# Altium PCB PLL_PCB.PcbDoc (part 3 of 3)
Units mil, origin at the board's own origin, x right, y up, seen from the top; angles counter-clockwise.
Board outline 8251 x 7030 mil, 4 copper layers (Top Layer, Mid-Layer 1, Mid-Layer 2, Bottom Layer); 235 components, 120 nets, 656 pads, 49 vias.
Unrouted connection lines stored in the file: 215.
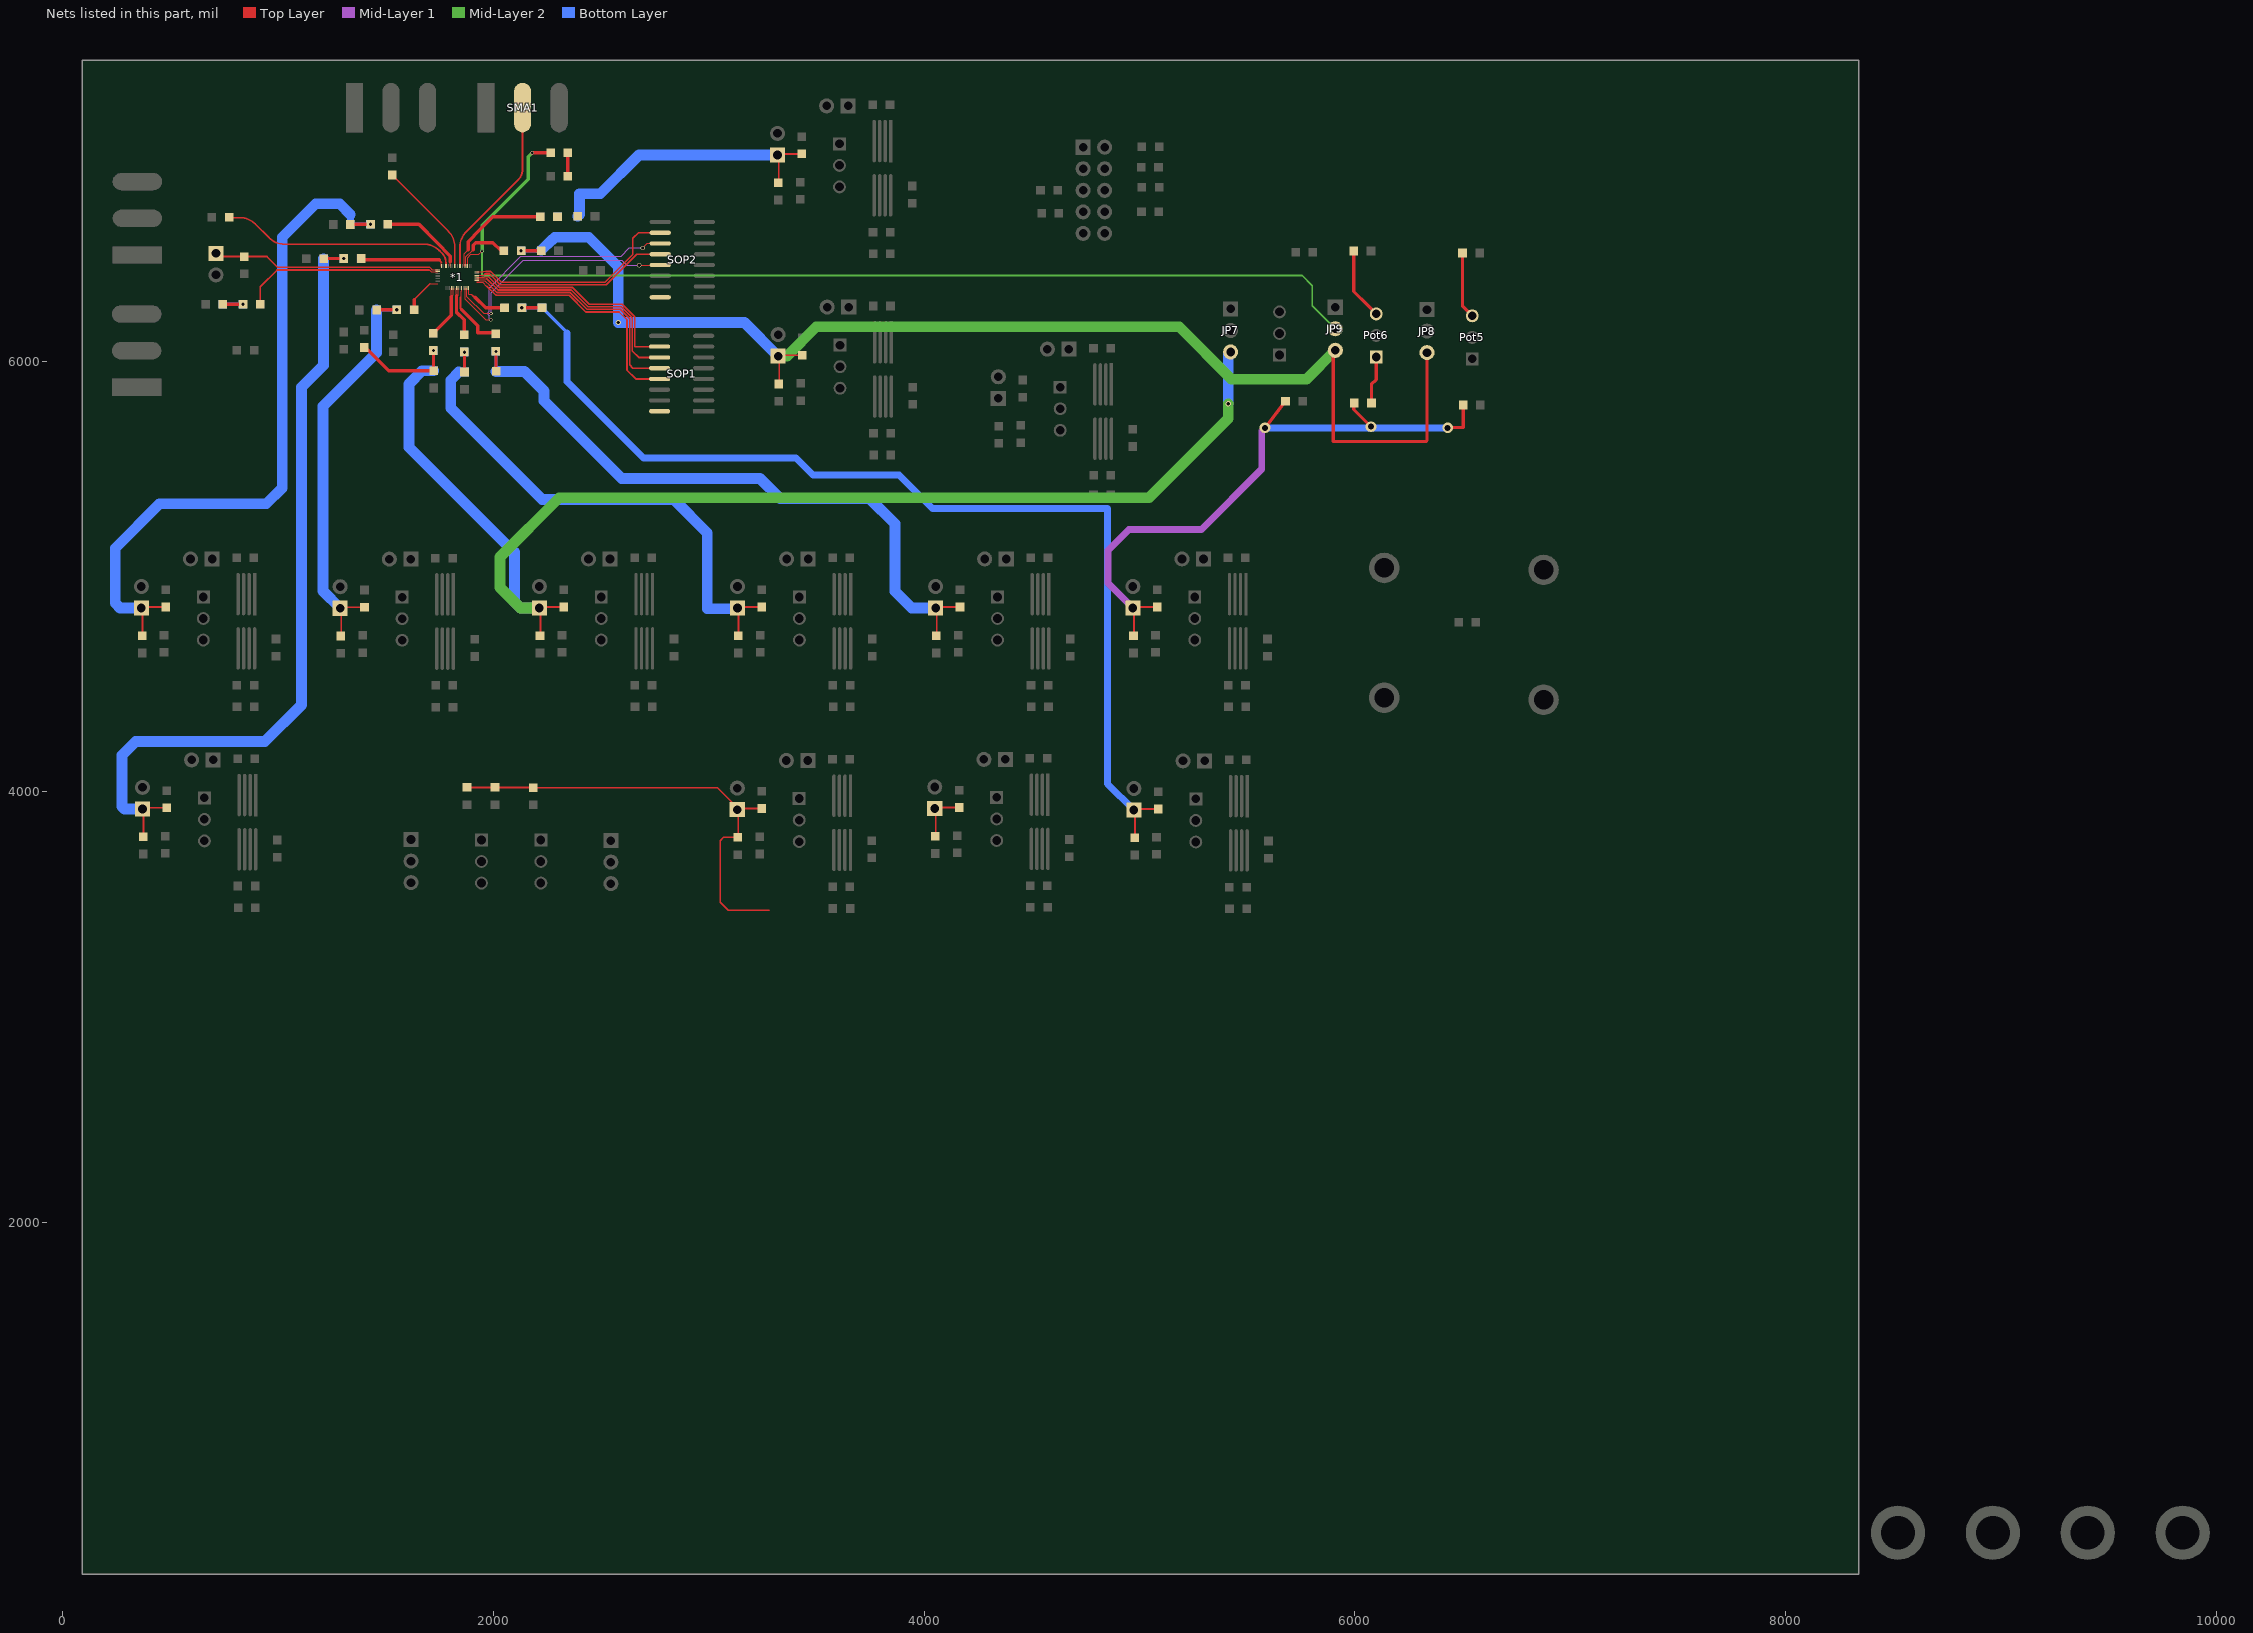
[diagram p5: the nets of this part, all layers, seen from the top]

## Via types
v1: diameter 15, hole 10, Top Layer to Bottom Layer, 17 vias
v2: diameter 50, hole 28, Top Layer to Bottom Layer, 16 vias
v3: diameter 20, hole 15, Top Layer to Bottom Layer, 11 vias
v4: diameter 25, hole 15, Top Layer to Bottom Layer, 5 vias

## Nets (pads, with @x,y where several pads share a name; then routed paths per layer and width w, separated by ;. In a path a pad name is that pad's centre, name@x,y a point inside that pad or via, vN(x,y) a via of type N, cw(c..) or ccw(c..) an arc to the next point about the centre after c; other vN are vias at no path point) (continued)
NetPot5_3: Pot5.3 R15.1 | length 310.6
  Top Layer w15: R15.1@6500,6503 6500,6256 Pot5.3@6545,6211
NetPot6_1: Pot6.1 R13.0 | length 223.1
  Top Layer w15: R13.0@6077,5806 6077,5893 6099,5915 Pot6.1@6099,6020
NetPot6_3: Pot6.3 R16.1 | length 335.1
  Top Layer w15: R16.1@5995,6512 5995,6324 6057,6262 Pot6.3@6099,6220
OUT_U_LDO1: C2_U_LDO1.1 JP2_U_LDO1.1 R1_U_LDO1.1 R11.1 R12.1 R13.1 | length 2923.9
  Top Layer w8: C2_U_LDO1.1@4972,4725 4974,4727 4974,4859 R1_U_LDO1.1@5082,4859
  Top Layer w15: v2(5583,5691) R11.1@5678,5815 ; R13.1@5997,5806 5995,5804 5995,5776 v2(6075,5696) ; v2@6432,5692 6503,5692 R12.1@6503,5797
  Mid-Layer 1 w32: JP2_U_LDO1.1@4969,4854 4853,4970 4853,5122 4950,5219 5287,5219 5567.5,5499.5 v2@5567.5,5675.5
  Bottom Layer w32: v2(5583,5691) v2@6425,5691
  other v2: 6431,5691
OUT_U_LDO2: C2_U_LDO2.1 C19_U_SUPPLY_DECAP_NW9.1 C20_U_SUPPLY_DECAP_NW9.1 C21_U_SUPPLY_DECAP_NW9.1 JP2_U_LDO2.1 R1_U_LDO2.1 R17_U_SUPPLY_DECAP_NW9.1 | length 1961.1
  Top Layer w8: C2_U_LDO2.1@1291,4724 1293,4726 1293,4858 R1_U_LDO2.1@1401,4858
  Top Layer w15: C21_U_SUPPLY_DECAP_NW9.1@1454,6239 v3(1551,6239)
  Bottom Layer w15: C19_U_SUPPLY_DECAP_NW9.1@1451,6239 C20_U_SUPPLY_DECAP_NW9.1@1550,6239 v3(1551,6239)
  Bottom Layer w50: JP2_U_LDO2.1@1288,4853 1208,4933 1208,5791 1457,6040 C19_U_SUPPLY_DECAP_NW9.1@1457,6238
OUT_U_LDO4: C2_U_LDO4.1 C19_U_SUPPLY_DECAP_NW1.1 C20_U_SUPPLY_DECAP_NW1.1 C21_U_SUPPLY_DECAP_NW1.1 JP2_U_LDO4.1 R1_U_LDO4.1 R17_U_SUPPLY_DECAP_NW1.1 | length 3822
  Top Layer w8: C2_U_LDO4.1@373,3792 375,3794 375,3926 R1_U_LDO4.1@483,3926
  Top Layer w15: C21_U_SUPPLY_DECAP_NW1.1@1208,6477 v3(1305,6477)
  Bottom Layer w15: C19_U_SUPPLY_DECAP_NW1.1@1205,6477 C20_U_SUPPLY_DECAP_NW1.1@1304,6477 v3(1305,6477)
  Bottom Layer w50: JP2_U_LDO4.1@370,3921 286,3921 275,3932 275,4170 339,4234 938,4234 1108,4404 1108,5879 1211,5982 C19_U_SUPPLY_DECAP_NW1.1@1211,6476
OUT_U_LDO5: C2_U_LDO5.1 C19_U_SUPPLY_DECAP_NW5.1 C20_U_SUPPLY_DECAP_NW5.1 C21_U_SUPPLY_DECAP_NW5.1 JP2_U_LDO5.1 R1_U_LDO5.1 R17_U_SUPPLY_DECAP_NW5.1 | length 5032.4
  Top Layer w8: C2_U_LDO5.1@4977,3787 4979,3789 4979,3921 R1_U_LDO5.1@5087,3921
  Top Layer w15: v3(2131,6248) C21_U_SUPPLY_DECAP_NW5.1@2228,6248
  Bottom Layer w15: v3(2131,6248) C20_U_SUPPLY_DECAP_NW5.1@2132,6248 C19_U_SUPPLY_DECAP_NW5.1@2226,6248 ; C19_U_SUPPLY_DECAP_NW5.1@2225,6249 C19_U_SUPPLY_DECAP_NW5.1@2226,6248 ; 2342,6132 C19_U_SUPPLY_DECAP_NW5.1@2226,6248
  Bottom Layer w32: 2342,6132 2342,5905 2697,5550 3404,5550 3483,5471 3884,5471 4038,5317 4852,5317 4852,4038 JP2_U_LDO5.1@4974,3916
OUT_U_LDO6: C2_U_LDO6.1 C19_U_SUPPLY_DECAP_NW3.1 C20_U_SUPPLY_DECAP_NW3.1 C21_U_SUPPLY_DECAP_NW3.1 JP2_U_LDO6.1 R1_U_LDO6.1 R17_U_SUPPLY_DECAP_NW3.1 | length 1334.7
  Top Layer w8: C2_U_LDO6.1@3322,6829 3324,6831 3324,6963 R1_U_LDO6.1@3432,6963
  Bottom Layer w50: C19_U_SUPPLY_DECAP_NW3.1@2391,6673 2399,6681 2399,6778 2496,6778 2676,6958 ; 2687,6958 JP2_U_LDO6.1@3319,6958
OUT_U_LDO7: C2_U_LDO7.1 C19_U_SUPPLY_DECAP_NW10.1 C20_U_SUPPLY_DECAP_NW10.1 C21_U_SUPPLY_DECAP_NW10.1 JP2_U_LDO7.1 R1_U_LDO7.1 R17_U_SUPPLY_DECAP_NW10.1 SOP1.16 SOP2.16 | length 439.8
  Top Layer w8: C2_U_LDO7.1@4052,3794 4054,3796 4054,3928 R1_U_LDO7.1@4162,3928
  Top Layer w15: C21_U_SUPPLY_DECAP_NW10.1@740,6265 v3(837,6265)
  Bottom Layer w15: C19_U_SUPPLY_DECAP_NW10.1@737,6265 v3(837,6265)
OUT_U_LDO8: C2_U_LDO8.1 C19_U_SUPPLY_DECAP_NW7.1 C20_U_SUPPLY_DECAP_NW7.1 C21_U_SUPPLY_DECAP_NW7.1 JP2_U_LDO8.1 R1_U_LDO8.1 R17_U_SUPPLY_DECAP_NW7.1 | length 2559.2
  Top Layer w8: C2_U_LDO8.1@3136,4725 3138,4727 3138,4859 R1_U_LDO8.1@3246,4859
  Top Layer w15: R17_U_SUPPLY_DECAP_NW7.1@1864,6044 1865,6043 v3(1865,6042) C21_U_SUPPLY_DECAP_NW7.1@1865,5950
  Bottom Layer w15: 1839,5950 C19_U_SUPPLY_DECAP_NW7.1@1865,5950 v3(1865,6042)
  Bottom Layer w50: 1839,5950 1801,5912 1801,5783 2226,5358 2838,5358 2993,5203 2993,4851 JP2_U_LDO8.1@3130,4851
OUT_U_LDO9: C2_U_LDO9.1 C19_U_SUPPLY_DECAP_NW6.1 C20_U_SUPPLY_DECAP_NW6.1 C21_U_SUPPLY_DECAP_NW6.1 JP2_U_LDO9.1 R1_U_LDO9.1 R17_U_SUPPLY_DECAP_NW6.1 | length 3135.2
  Top Layer w8: C2_U_LDO9.1@4056,4725 4058,4727 4058,4859 R1_U_LDO9.1@4166,4859
  Top Layer w15: R17_U_SUPPLY_DECAP_NW6.1@2011,6047 2012,6046 v3(2012,6045) C21_U_SUPPLY_DECAP_NW6.1@2012,5953
  Bottom Layer w15: C19_U_SUPPLY_DECAP_NW6.1@2012,5953 v3(2012,6045)
  Bottom Layer w50: C19_U_SUPPLY_DECAP_NW6.1@2012,5953 2144,5953 2235,5862 2235,5817 2596,5456 3238,5456 3331,5363 3746,5363 3864,5245 3864,4932 3942,4854 JP2_U_LDO9.1@4053,4854
OUT_U_LDO10: C2_U_LDO10.1 C19_U_SUPPLY_DECAP_NW2.1 C20_U_SUPPLY_DECAP_NW2.1 C21_U_SUPPLY_DECAP_NW2.1 JP2_U_LDO10.1 R1_U_LDO10.1 R17_U_SUPPLY_DECAP_NW2.1 | length 3322.8
  Top Layer w8: C2_U_LDO10.1@368,4725 370,4727 370,4859 R1_U_LDO10.1@478,4859
  Top Layer w15: C21_U_SUPPLY_DECAP_NW2.1@1332,6636 v3(1429,6636)
  Bottom Layer w15: C19_U_SUPPLY_DECAP_NW2.1@1335,6624 C19_U_SUPPLY_DECAP_NW2.1@1335,6635 ; C19_U_SUPPLY_DECAP_NW2.1@1347,6636 C20_U_SUPPLY_DECAP_NW2.1@1428,6636 v3(1429,6636)
  Bottom Layer w32: C19_U_SUPPLY_DECAP_NW2.1@1335,6635 1335,6682
  Bottom Layer w50: JP2_U_LDO10.1@365,4854 266,4854 243,4877 243,5132 449,5338 945,5338 1019,5412 1019,6576 1174,6731 1286,6731 1335,6682
OUT_U_LDO11: C2_U_LDO11.1 C16.1 C19_U_SUPPLY_DECAP_NW8.1 C20_U_SUPPLY_DECAP_NW8.1 C21_U_SUPPLY_DECAP_NW8.1 JP2_U_LDO11.1 JP7.3 R1_U_LDO11.1 R17_U_SUPPLY_DECAP_NW8.1 | length 6567.5
  Top Layer w8: C2_U_LDO11.1@2216,4725 2218,4727 2218,4859 R1_U_LDO11.1@2326,4859
  Top Layer w15: C16.1@1418,6052 1514,5956 C21_U_SUPPLY_DECAP_NW8.1@1721,5956 ; v3(1721,6050) C21_U_SUPPLY_DECAP_NW8.1@1721,5956 ; C21_U_SUPPLY_DECAP_NW8.1@1722,5956 C21_U_SUPPLY_DECAP_NW8.1@1721,5956
  Mid-Layer 2 w50: JP2_U_LDO11.1@2213,4854 2125,4854 2030,4949 2030,5091 2305,5366 5044,5366 5412,5734 v4(5412,5803)
  Bottom Layer w15: v3(1721,6050) C20_U_SUPPLY_DECAP_NW8.1@1721,6049 1721,5956 C19_U_SUPPLY_DECAP_NW8.1@1722,5956
  Bottom Layer w50: C19_U_SUPPLY_DECAP_NW8.1@1721,5956 1668,5956 1607,5895 1607,5601 2094,5114 ; 2098,5114 2098,4881 2125,4854 JP2_U_LDO11.1@2213,4854 ; v4(5412,5803) JP7.3@5412,6032
OUT_U_LDO12: C2_U_LDO12.1 C17.1 C18.1 C19_U_SUPPLY_DECAP_NW4.1 C20_U_SUPPLY_DECAP_NW4.1 C21_U_SUPPLY_DECAP_NW4.1 JP2_U_LDO12.1 JP8.3 JP9.3 R1_U_LDO12.1 R17_U_SUPPLY_DECAP_NW4.1 | length 6099
  Top Layer w8: C2_U_LDO12.1@3324.5,5894.5 3326.5,5896.5 3326.5,6028.5 R1_U_LDO12.1@3434.5,6028.5
  Top Layer w15: v3(2128,6513) C21_U_SUPPLY_DECAP_NW4.1@2225,6513 ; C17.1@2345,6857 C18.1@2345,6957 ; JP9.3@5900,6037 5900,5628 6331,5628 6335,5632 JP8.3@6335,6040
  Mid-Layer 2 w50: JP2_U_LDO12.1@3321.5,6023.5 3362.5,6023.5 3499,6160 5184,6160 5427,5917 5775,5917 JP9.3@5909,6051
  Bottom Layer w15: v3(2128,6513) C20_U_SUPPLY_DECAP_NW4.1@2129,6513 C19_U_SUPPLY_DECAP_NW4.1@2228,6513
  Bottom Layer w50: C19_U_SUPPLY_DECAP_NW4.1@2222,6515.01 2269.99,6563 2271,6563 2284,6576 2442,6576 2579,6439 v4(2579,6180) 3165,6180 JP2_U_LDO12.1@3321.5,6023.5
OUT_U_LDO13: C2_U_LDO13.1 C14.0 JP2_U_LDO13.1 R1_U_LDO13.1 R9.1 R10.1 | length 2151.5
  Top Layer w8: C14.0@1877,4021 R9.1@2007,4021 R10.1@2183,4021 ; R10.1@2184,4020 3040,4020 JP2_U_LDO13.1@3132,3928 ; R1_U_LDO13.1@3245,3923 3137,3923 3137,3791 C2_U_LDO13.1@3135,3789 3068,3789 3053,3774 3053,3487 3090,3450 3279,3450
PD_DLL_OUT: *1.1 C6.0 JP4.1 | length 1063.6
  Top Layer w4: JP4.1@711,6501 JP4.1@726,6486 ; 1703.14,6437 1712,6428.14 1712,6425.31 1713.31,6424 *1.1@1741,6424
  Top Layer w8: JP4.1@726,6486 C6.0@843,6486 948,6486 997,6437 1703.14,6437
PHASE_DLL_PHASE_OUT: *1.41 C9.0 | length 1092.7
  Top Layer w8: C9.0@788,6667 822.58,6667 cw(c822.58,6567) 893.29,6637.71 957.71,6573.29 ccw(c1028.42,6644) 1028.42,6544 1676.58,6544 cw(c1676.58,6444) 1747.29,6514.71 1761,6501 cw(c1717.54,6457.54) 1779,6457.54 *1.41@1779,6442
PLL_CLK_OUT: *1.35 SMA1.5 | length 854
  Top Layer w8: *1.35@1844,6442 1844,6532.58 ; 1844,6530.58 cw(c1944,6530.58) 1873.29,6601.29 ; 1871.29,6599.29 2114.5,6842.5 ; 2114.55,6842.55 ccw(c2065.01,6891.99) 2135,6891.99 SMA1.5@2135,7178
PLL_CLK_OUTB: *1.37 C10.0 | length 541.2
  Top Layer w8: C10.0@1529,6857.42 C10.0@1529,6865 1790.71,6603.29 cw(c1720,6532.58) 1820,6532.58 *1.37@1820,6447.58
PLL_EXT_VCTRL: *1.31 C18.0 JP9.2 | length 4979.1
  Top Layer w4: *1.31@1880,6442 1880,6481.69 1894.31,6496 1932,6496 v1(1947,6511)
  Top Layer w16: v1(2180,6968) C18.0@2255,6968
  Mid-Layer 2 w8: v1(1947,6511) 1947,6398 5755,6398 5802,6351 5802,6258 JP9.2@5909,6151
  Mid-Layer 2 w16: v1(1947,6511) 1947,6631 2162,6846 2162,6950 v1(2180,6968)
READ_SERIAL_OUT: *1.20 SOP2.13 | length 1139.7
  Top Layer w4: *1.20@1876,6340 1876,6300 1954,6222 v1(1989,6222) ; v3(2677,6446) 2773.28,6446 SOP2.13@2774.28,6447
  Mid-Layer 1 w4: v1(1989,6222) 1989,6319 2139,6469 2595,6469 2618,6446 v3(2677,6446)
RESETB: *1.19 SOP2.11 | length 1250.9
  Top Layer w4: *1.19@1868,6340 1868,6288 1963,6193 v1(1987,6193) ; v3(2693,6526) 2714,6547 SOP2.11@2774.28,6547
  Mid-Layer 1 w4: v1(1987,6193) 1982,6193 1980,6195 1980,6211.91 1975.5,6216.41 1975.5,6227.59 1980,6232.09 1980,6340 2127,6487 2592,6487 2631,6526 v3(2693,6526)
  Bottom Layer w4: v1@1983,6193 v1(1987,6193)
SCAN_CLK: *1.25 SOP1.10 | length 1065.5
  Top Layer w4: *1.25@1922,6391 1958,6391 1960,6393 1975.91,6393 1977.43,6391.49
  Top Layer w8: 1977.43,6391.49 2023.91,6345 2025.03,6345 2027.03,6343 2365.91,6343 2443.91,6265 2597.91,6265 2656,6206.91 2656,6069 2657,6068 SOP1.10@2771.28,6068
SCAN_CLK2: *1.24 SOP1.11 | length 1090.7
  Top Layer w4: *1.24@1922,6383 1966.11,6383
  Top Layer w8: 1966.11,6383 1968.94,6383 2018.94,6333 2020.06,6333 2022.06,6331 2360.94,6331 2438.94,6253 2592.94,6253 2644,6201.94 2644,6047.94 2673.94,6018 SOP1.11@2771.28,6018
SCAN_EN: *1.23 SOP1.12 | length 1143.2
  Top Layer w4: *1.23@1922,6375 1959.97,6375 1981.49,6353.49
  Top Layer w8: 1981.49,6353.49 2013.97,6321 2015.09,6321 2017.09,6319 2355.97,6319 2433.97,6241 2587.97,6241 2632,6196.97 2632,5983 2647,5968 SOP1.12@2771.28,5968
SCAN_IN: *1.22 SOP1.13 | length 1172.3
  Top Layer w4: *1.22@1922,6367 1949,6367 1967,6349
  Top Layer w8: 1967,6349 1969,6349 2009,6309 2010.12,6309 2012.12,6307 2351,6307 2429,6229 2583,6229 2620,6192 2620,5958 2660,5918 SOP1.13@2771.28,5918
SCAN_LOAD: *1.28 SOP2.10 | length 1013
  Top Layer w4: *1.28@1922,6415 1953,6415 1955,6417 1964,6417
  Top Layer w8: 1964,6417 1986.97,6417 2036.97,6367 2518,6367 2647,6496 2647,6571 2673,6597 SOP2.10@2774.28,6597
SCAN_OUT: *1.26 SOP2.12 | length 934.3
  Top Layer w4: *1.26@1922,6399 1954.69,6399 1960.69,6405
  Top Layer w8: 1960.69,6405 1982,6405 2032,6355 2523,6355 2665,6497 SOP2.12@2774.28,6497
VDD_CHIP: *1.39 R17_U_SUPPLY_DECAP_NW2.0 | length 397.6
  Top Layer w4: 1798.46,6462.94 cw(c1707.26,6453) 1799,6453 *1.39@1799,6442
  Top Layer w16: R17_U_SUPPLY_DECAP_NW2.0@1509,6636 1654,6636 1736.88,6553.12 1798.46,6487.13 1798.46,6462.94
VDD_DLL_OUT_CHIP: *1.43 R17_U_SUPPLY_DECAP_NW1.0 | length 401.6
  Top Layer w4: R17_U_SUPPLY_DECAP_NW1.0@1385,6470.86 R17_U_SUPPLY_DECAP_NW1.0@1385,6477 ; *1.43@1758,6442 1758,6460
  Top Layer w8: 1747.14,6470.86 1758,6460
  Top Layer w16: R17_U_SUPPLY_DECAP_NW1.0@1385,6470.86 1747.14,6470.86
VDD_NO_COUNT_CHIP: *1.2 R17_U_SUPPLY_DECAP_NW10.0 | length 940.6
  Top Layer w4: 1702,6424 1710,6416 *1.2@1741,6416
  Top Layer w8: R17_U_SUPPLY_DECAP_NW10.0@917,6265 917,6346 995,6424 1702,6424
VDD_OSCILLATOR_CHIP: *1.32 R17_U_SUPPLY_DECAP_NW4.0 | length 274.4
  Top Layer w4: *1.32@1872,6442 1872,6485 1905,6518 ; R17_U_SUPPLY_DECAP_NW4.0@2035,6513 R17_U_SUPPLY_DECAP_NW4.0@2048,6513
  Top Layer w16: 1905,6518 1905,6539 1917,6551 1997,6551 R17_U_SUPPLY_DECAP_NW4.0@2035,6513
VDD_OUTPUTBUFF_CHIP: *1.33 R17_U_SUPPLY_DECAP_NW3.0 | length 499.6
  Top Layer w4: *1.33@1864,6442 1864,6499.86 1882,6517.86
  Top Layer w16: 1882,6517.86 1882,6554 1882,6555 1908.03,6581.03 ; 1910.5,6585.5 1997,6672 R17_U_SUPPLY_DECAP_NW3.0@2217,6672
VDD_PC_CHIP: *1.14 *1.15 R17_U_SUPPLY_DECAP_NW7.0 | length 272.7
  Top Layer w4: *1.14@1828,6340 1828,6305 1834,6305 1836,6307 *1.15@1836,6340
  Top Layer w16: 1828,6305 1828,6228 1864,6192 R17_U_SUPPLY_DECAP_NW7.0@1864,6124
VDD_PD_CHIP: *1.17 R17_U_SUPPLY_DECAP_NW6.0 | length 321.6
  Top Layer w4: 1846,6245 1850,6241 ; 1846,6296 1850,6300 1850,6325.51 1852,6327.51 *1.17@1852,6340
  Top Layer w8: 1850,6241 1852,6239
  Top Layer w10: 1846,6245 1846,6296
  Top Layer w16: 1852,6239 1926,6165 1926,6133 R17_U_SUPPLY_DECAP_NW6.0@2005,6133
VDD_REF_CHIP: *1.7 R17_U_SUPPLY_DECAP_NW9.0 | length 187.7
  Top Layer w4: 1705,6360 *1.7@1741,6360
  Top Layer w8: 1631,6286 1705,6360
  Top Layer w16: R17_U_SUPPLY_DECAP_NW9.0@1631,6239 1631,6286
VDD_SCAN_CHIP: *1.21 R17_U_SUPPLY_DECAP_NW5.0 | length 222.1
  Top Layer w4: *1.21@1884,6340 1884,6311 1896,6311 1901,6306
  Top Layer w8: 1901,6306 1910,6297 1914,6297
  Top Layer w16: 1914,6297 1963,6248 R17_U_SUPPLY_DECAP_NW5.0@2051,6248
VDD_VCDL_CHIP: *1.11 *1.12 R17_U_SUPPLY_DECAP_NW8.0 | length 287.7
  Top Layer w4: *1.11@1804,6340 1804,6300 1812,6308 *1.12@1812,6340
  Top Layer w16: R17_U_SUPPLY_DECAP_NW8.0@1721,6130 1804,6213 1804,6300
pads on no net: JP3.6 Pillar5.1 Pot2.3 Pot3.3
copper on no net: | length 2
  Top Layer w8: 1830,7380 1832,7380

## Silkscreen, mask and mechanical layers (free items; w line width, h text height)
Top Overlay:
  text "CLK" at 2468,7293 h60 r270
  text "CLKB" at 1187,7107 h60 r90
  text "DLL_PHASE_OUT" at 178,6987 h60
  text "RBUF" at 2186,6732 h60
  text "RVDD" at 1303,6692 h60
  text "ROSC" at 2216,6449 h60 r180
  text "RDLO" at 1422,6417 h60 r180
  text "JP1" at 3678.5,6375.5 h60 r180
  text "C5" at 3846.5,6371.5 h60 r180
  text "PDAV" at 630,6340 h60 r90
  text "RSCN" at 2015,6307 h60
  text "RREF" at 1504,6297 h60
  text "JP2" at 3359.5,6250.5 h60 r180
  text "R1" at 3466.5,6226.5 h60 r180
  text "RNC" at 946,6204 h60 r180
  text "RPC" at 1770,6197 h60
  text "RPD" at 2072,6168 h60 r270
  text "RVCD" at 1661,5949 h60 r90
  text "C4" at 3487.5,5764.5 h60 r180
  text "C2" at 3353.5,5762.5 h60 r180
  text "C1" at 3920.5,5745.5 h60 r270
  text "C3" at 3703.5,5697.5 h60 r180
  text "INCLK" at 211,5648 h60
  text "R2" at 3694.5,5607.5 h60 r180
Bottom Overlay: